# EAGLE board 491 Circuit Schematic (EAGLE 9.5.0)

Size 160 x 100 mm. Coordinates in mm from the lower left corner, seen from the top.
Outline: 0,0 160,0 160,100 0,100 0,0
Copper layers (1*16): Top 0.035mm / dielectric 1.5mm / Bottom 0.035mm
Design rules "default": minimum track width 6mil, minimum drill 0.35mm, track to track 6mil, track to pad 6mil, pad to pad 6mil, via to via 6mil, smd to smd 6mil, copper to edge 40mil, drill to drill 6mil, minimum pad ring 10mil, minimum via ring 8mil, stop-mask expansion 4mil, vias tented up to drill 0mil, thermal gap 10mil

## Footprints (pad centres in the part's own frame; a part is rotated, then mirrored left to right if it is on the bottom)
02P = drill 0.914 long: 1 -1.27,0; 2 1.27,0
SL-340/P3.6V = drill 1.016 pad 2.159 octagon: + 0,0; - -7.62,0
E2,5-6 = drill 0.813 pad 1.6: + -1.27,0 | drill 0.813 pad 1.6 octagon: - 1.27,0
C2.5-5 = drill 0.813 pad 1.6 octagon: 1 -1.27,0; 2 1.27,0
U57X32 = drill 0.813 long: A -1.27,0; K 1.27,0
DO41-10 = drill 1.118: A 5.08,0; C -5.08,0
0207/5V = drill 0.813 octagon: 1 -2.54,0; 2 2.54,0
SWITCH_TERMINAL = drill 0.65: P$1 1.27,1.27; P$2 3.81,1.27
0204/7 = drill 0.813 octagon: 1 -3.81,0; 2 3.81,0
0207/10 = drill 0.813 octagon: 1 -5.08,0; 2 5.08,0
RELAY_SRD-05VDC-SL-C = drill 1.32 square: A1 -6.1,6 | drill 1.32: A2 -6.1,-6; NC 6.1,6; NO 6.1,-6 | drill 1.29: COM -8.1,0
KSS1201 = drill 0.914 pad 2.159 octagon: + 3.251,0; - -3.251,0
TO92 = drill 0.813 octagon: 1 1.27,0; 2 0,1.905; 3 -1.27,0
FEATHER_ONLY = smd 1.016 x 2.032 bottom: 01B 17.78,25.8; 02B 20.32,25.8; 03B 22.86,25.8; 04B 25.4,25.8; 05B 27.94,25.8; 06B 30.48,25.8; 07B 33.02,25.8; 08B 35.56,25.8; 09B 38.1,25.8; 10B 40.64,25.8; 11B 43.18,25.8; 12B 45.72,25.8; 13B 7.62,2.159; 14B 10.16,2.159; 15B 12.7,2.159; 16B 15.24,2.159; 17B 17.78,2.159; 18B 20.32,2.159; 19B 22.86,2.159; 20B 25.4,2.159; 21B 27.94,2.159; 22B 30.48,2.159; 23B 33.02,2.159; 24B 35.56,2.159; 25B 38.1,2.159; 26B 40.64,2.159; 27B 43.18,2.159; 28B 45.72,2.159 | smd 1.016 x 2.032: 01T 17.78,25.8; 02T 20.32,25.8; 03T 22.86,25.8; 04T 25.4,25.8; 05T 27.94,25.8; 06T 30.48,25.8; 07T 33.02,25.8; 08T 35.56,25.8; 09T 38.1,25.8; 10T 40.64,25.8; 11T 43.18,25.8; 12T 45.72,25.8; 13T 7.62,2.159; 14T 10.16,2.159; 15T 12.7,2.159; 16T 15.24,2.159; 17T 17.78,2.159; 18T 20.32,2.159; 19T 22.86,2.159; 20T 25.4,2.159; 21T 27.94,2.159; 22T 30.48,2.159; 23T 33.02,2.159; 24T 35.56,2.159; 25T 38.1,2.159; 26T 40.64,2.159; 27T 43.18,2.159; 28T 45.72,2.159
DC-DC-STEP-DOWN-MP1584 = drill 1.2 pad 2 square: IN+.1 -9.271,-4.064; IN+.2 -9.271,-6.604; OUT+.1 9.271,-4.064; OUT+.2 9.271,-6.604 | drill 1.2 pad 2: IN-.1 -9.271,6.604; IN-.2 -9.271,4.064; OUT-.1 9.271,6.604; OUT-.2 9.271,4.064
JST = drill 0.7 pad 1.1: 1 -2.25,0; 2 -0.75,0; 3 0.75,0; 4 2.25,0

## Placement (x,y rotation side)
12V_EXT  12V  [02P]  2.54,-95.25 0 top  (outside the outline)
12V_IN  12V  [02P]  2.54,-68.58 0 top  (outside the outline)
B1  SL-340/P3.6V  [SL-340/P3.6V]  -58.42,-91.44 0 top  (outside the outline)
B2  SL-340/P3.6V  [SL-340/P3.6V]  -35.56,-91.44 0 top  (outside the outline)
B3  SL-340/P3.6V  [SL-340/P3.6V]  -12.7,-91.44 0 top  (outside the outline)
BATTERY  12V  [02P]  13.97,-68.58 0 top  (outside the outline)
BATTERY_EXT  12V  [02P]  -109.22,-106.68 0 top  (outside the outline)
C1  47 uF  [E2,5-6]  22.86,-67.31 0 top  (outside the outline)
C2  0.1 uF  [C2.5-5]  2.54,-77.47 0 top  (outside the outline)
D1  U57X32  [U57X32]  5.08,63.5 0 top
D2  U57X32  [U57X32]  5.08,76.2 0 top
D3  U57X32  [U57X32]  5.08,87.63 0 top
D4  1N4004  [DO41-10]  5.08,-34.29 0 top  (outside the outline)
D5  1N4004  [DO41-10]  12.7,-77.47 0 top  (outside the outline)
D6  1N4004  [DO41-10]  5.08,-86.36 0 top  (outside the outline)
L2  SOLENOID  [0207/5V]  15.24,-33.02 0 top  (outside the outline)
LOCK_SWITCH  LOCK_SWITCH  [SWITCH_TERMINAL]  0,-2.54 0 top
R1  [0204/7]  3.81,-6.35 0 top  (outside the outline)
R2  [0204/7]  3.81,-11.43 0 top  (outside the outline)
R3  [0204/7]  13.97,-40.64 0 top  (outside the outline)
R4  1k  [0207/10]  17.78,-86.36 0 top  (outside the outline)
R5  [0204/7]  3.81,-102.87 0 top  (outside the outline)
RELAY  SRD-05VDC-SL-C  [RELAY_SRD-05VDC-SL-C]  24.13,19.05 270 top
SP1  KSS1201  [KSS1201]  127,83.82 0 top
T1  [TO92]  2.54,-40.64 0 top  (outside the outline)
U$1  TEMPLATE_ARGON/BORON/XENONFEATHER_ONLY  [FEATHER_ONLY]  53.34,57.15 0 top
U$2  DC-DC-STEP-DOWN-MP1584  [DC-DC-STEP-DOWN-MP1584]  -81.28,-100.33 0 top  (outside the outline)
U$3  FPS  [JST]  -99.06,-104.14 0 top  (outside the outline)

## Library data of the parts
12V_EXT 12V_IN BATTERY BATTERY_EXT = con-amp-quick; OC_FARNELL: unknown; OC_NEWARK: unknown
B1-B3 = battery
C1 = rcl; SPICEPREFIX: C
C2 = capacitor-wima
D1-D3 = led
D4-D6 = diode
L2 = rcl; SPICEPREFIX: L
LOCK_SWITCH U$1-U$3 = cool_safe_lib
R1-R5 = rcl; SPICEPREFIX: R
RELAY = SRD-05VDC-SL-C; AVAILABILITY: Unavailable; DESCRIPTION: 5V Trigger Relay Module For Arduino And Raspberry Pi 5V Trigger Relay Module For Arduino And Raspberry Pi; MF: Songle Relay; MP: SRD-05VDC-SL-C; PACKAGE: None; PRICE: None
SP1 = buzzer; OC_FARNELL: unknown; OC_NEWARK: unknown
T1 = transistor

## Nets
0: 12V_EXT.2 12V_IN.2 B1.- BATTERY.2 BATTERY_EXT.2 C1.- C2.2 L2.2 R1.1 R2.1 T1.1 U$1.16B U$1.16T U$2.IN-.1 U$2.IN-.2 U$2.OUT-.1 U$2.OUT-.2 U$3.3
+3V3: D4.C LOCK_SWITCH.P$1 RELAY.A1 U$1.14B U$1.14T U$2.OUT+.1 U$3.4
+12V: C1.+ C2.1 D5.C D6.C R4.2 RELAY.COM U$2.IN+.1
FPS: SP1.-
N$1: 12V_EXT.1
N$2: R5.2 SP1.+
N$3: B2.+ B3.-
N$4: R5.1 U$1.17B U$1.17T
N$5: B1.+ B2.-
N$6: D1.A U$1.06B U$1.06T
N$7: D2.A U$1.05B U$1.05T
N$8: D3.A U$1.04B U$1.04T
N$9: LOCK_SWITCH.P$2 R2.2 U$1.07B U$1.07T
N$10: D1.K D2.K D3.K R1.2
N$11: D4.A RELAY.A2 T1.3
N$13: L2.1 RELAY.NO
N$14: BATTERY.1 D6.A R4.1
N$16: U$1.26B U$1.26T U$3.1
N$17: R3.2 T1.2
N$18: R3.1 U$1.21B U$1.21T
N$19: U$1.18B U$1.18T
N$22: U$1.19B U$1.19T
N$25: U$1.20B U$1.20T
N$28: U$1.27B U$1.27T U$3.2
N$29: 12V_IN.1 D5.A
N$30: B3.+ BATTERY_EXT.1

## Tracks (layer width: path | path; a pad name or v marks a point on that pad's centre or on a via)
0  (16 unrouted)
+3V3  (5 unrouted)
+12V  (6 unrouted)
N$2  (1 unrouted)
N$3  (1 unrouted)
N$4  (1 unrouted)
N$5  (1 unrouted)
N$6  (1 unrouted)
N$7  (1 unrouted)
N$8  (1 unrouted)
N$9  (2 unrouted)
N$10  (3 unrouted)
N$11  (2 unrouted)
N$13  (1 unrouted)
N$14  (2 unrouted)
N$16  (1 unrouted)
N$17  (1 unrouted)
N$18  (1 unrouted)
N$28  (1 unrouted)
N$29  (1 unrouted)
N$30  (1 unrouted)